# Altium PCB nrf52840_bma250e.PcbDoc
Units mm, origin at the board's own origin, x right, y up, seen from the top; angles counter-clockwise.
Board outline 28.1 x 32.5 mm, 2 copper layers (Top Layer, Bottom Layer), stack 0.325 mm thick; 21 components, 59 nets, 119 pads, 88 vias.
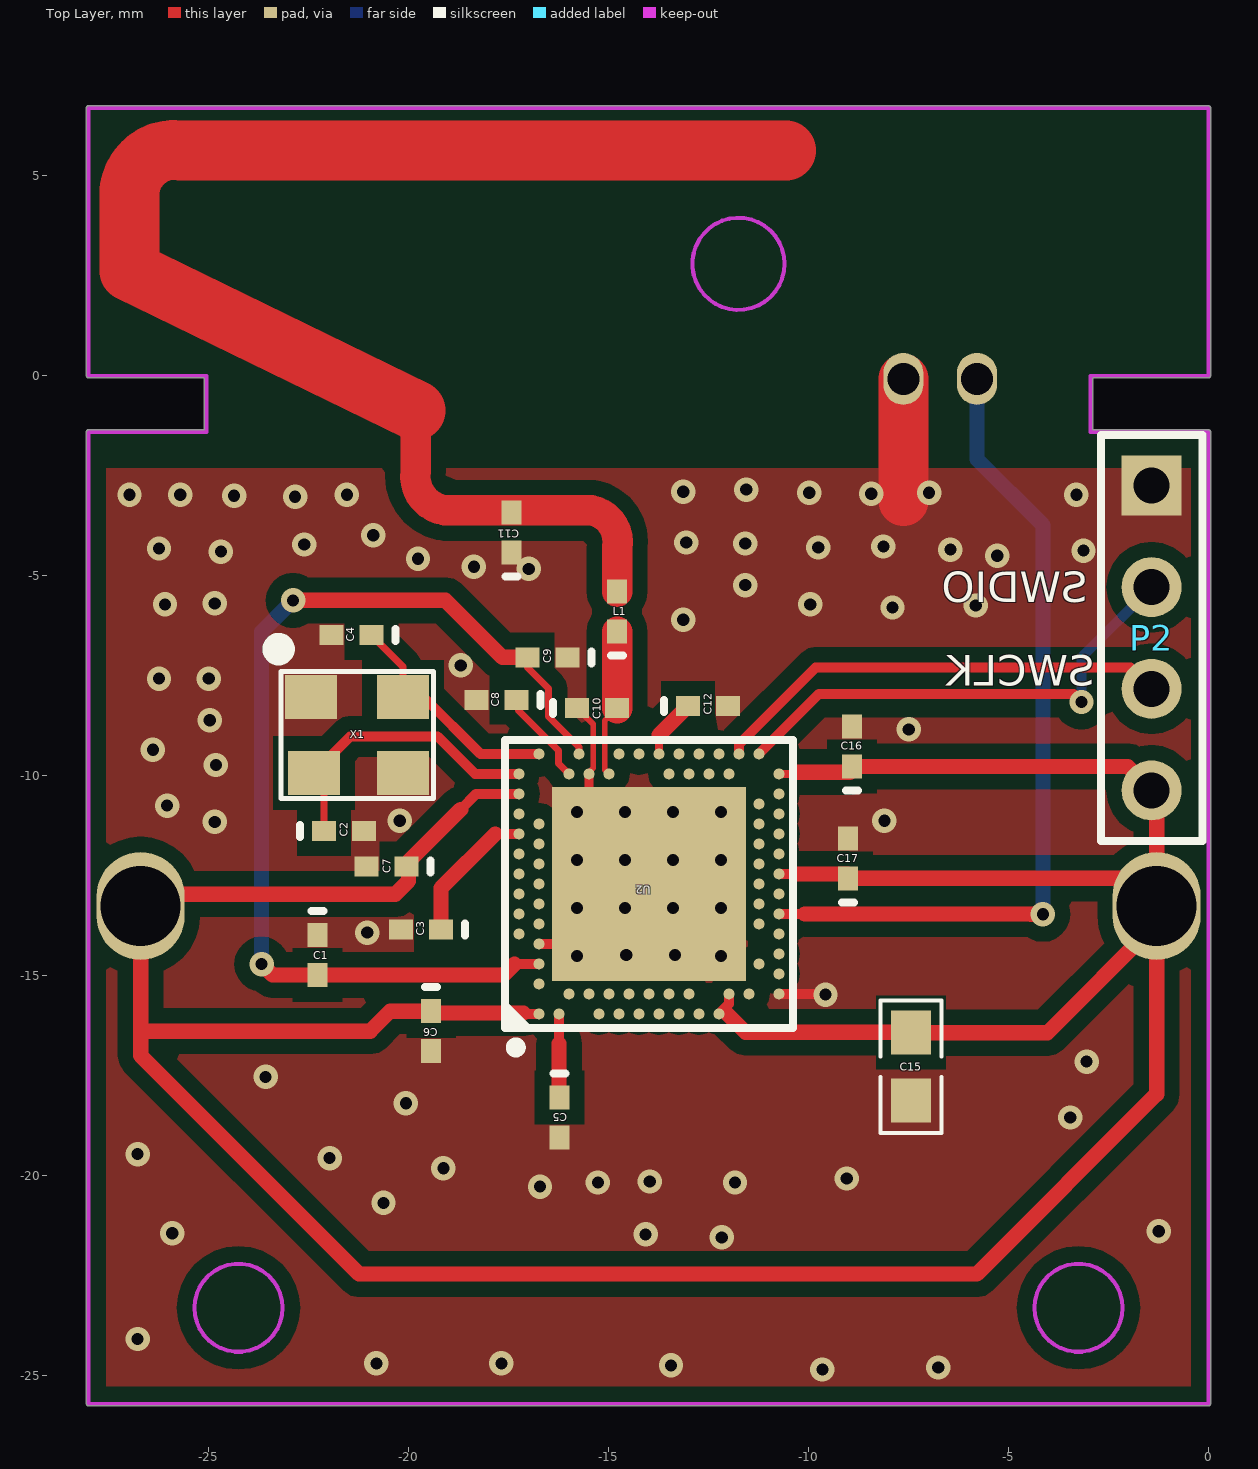
[diagram p0: Top Layer view]
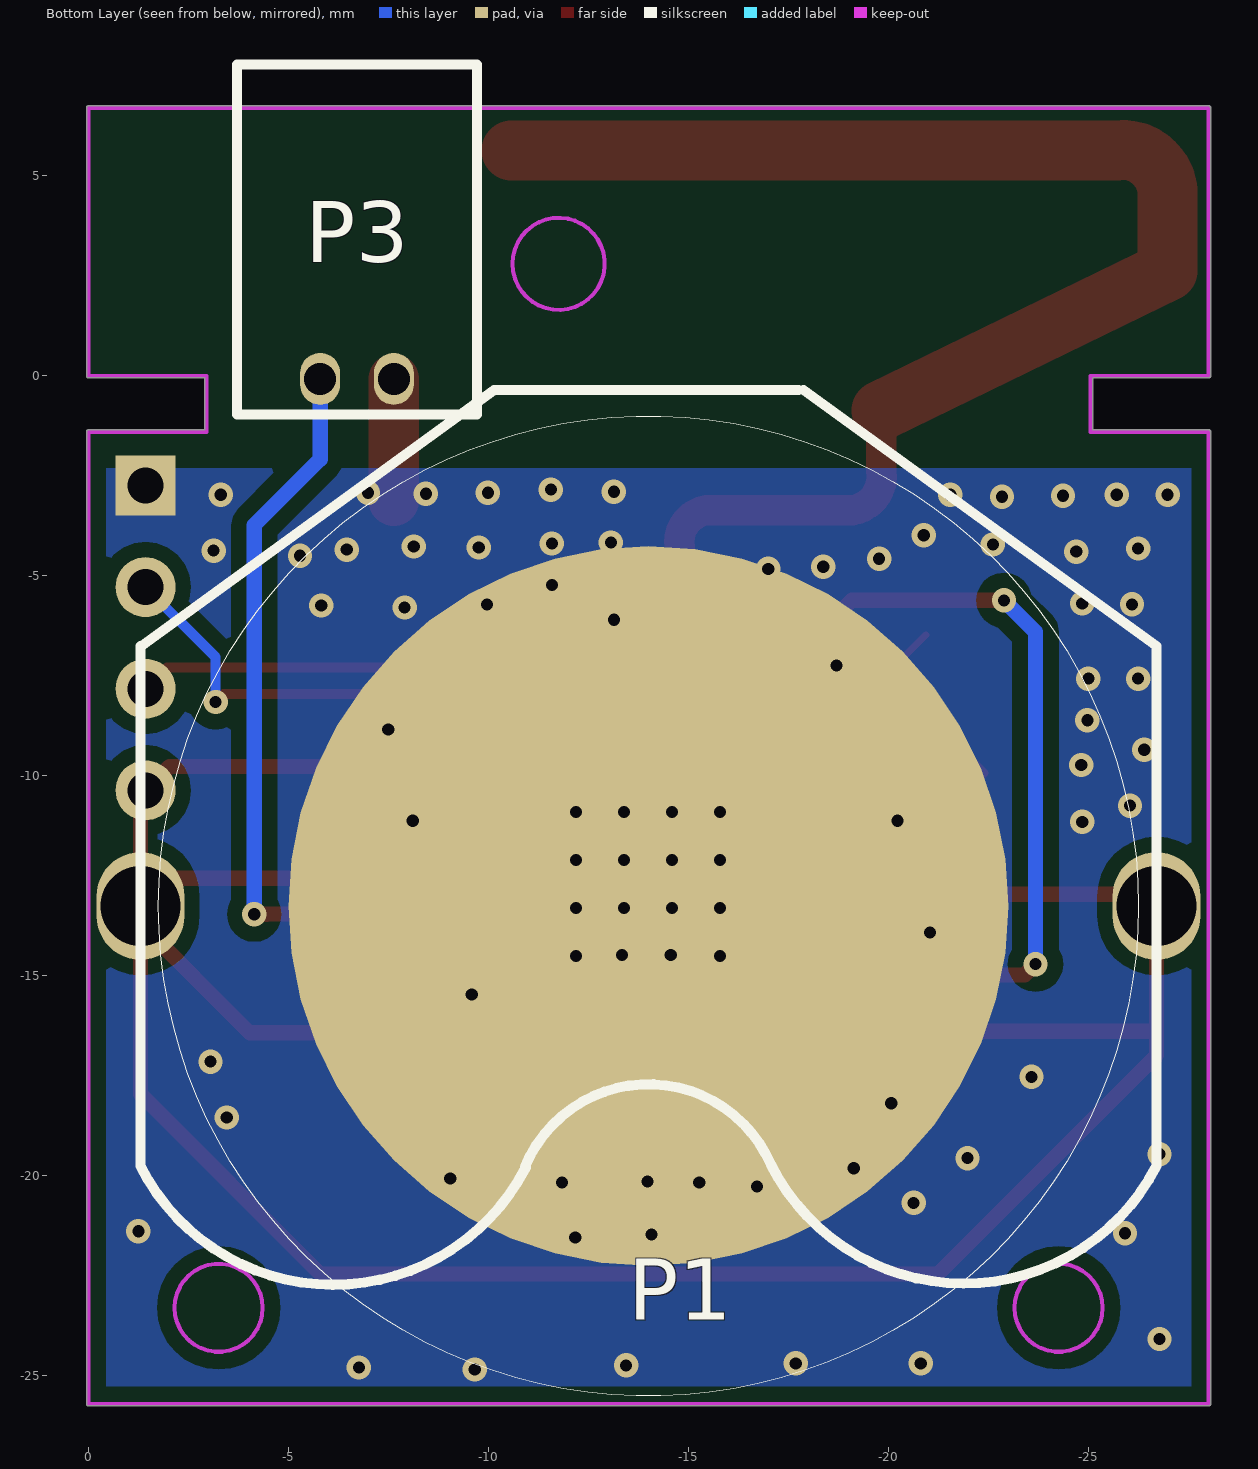
[diagram p1: Bottom Layer view, seen from below]

## Layer stack, top to bottom
Top Layer: signal copper 0.0356
Dielectric: core 0.254, FR-4, Dk 4.2
Bottom Layer: signal copper 0.0356

## Board outline
-28.051,-25.7 ccw(c-28,-25.7) -28,-25.751 0,-25.751 ccw(c0,-25.7) 0.051,-25.7 0.051,-1.4 ccw(c0,-1.4) 0,-1.349 -2.899,-1.349 -2.899,-0.051 0,-0.051 ccw(c0,0) 0.051,0 0.051,6.7 ccw(c0,6.7) 0,6.751 -28,6.751 ccw(c-28,6.7) -28.051,6.7 -28.051,0 ccw(c-28,0) -28,-0.051 -25.101,-0.051 -25.101,-1.349 -28,-1.349 ccw(c-28,-1.4) -28.051,-1.4

## Design rules (kind name [scope] priority, off if disabled: settings)
Clearance [All] p1: gap=0.127
ComponentClearance [All] p1 off: gap=0.254 collisioncheckmode=3 verticalgap=0.254 showdistances=FALSE
Height [All] p1 off: minheight=0 maxheight=25.4 prefheight=12.7
MinimumSolderMaskSliver [All] p1 off: minsoldermaskwidth=0.254
NetAntennae [All] p1 off: netantennaetolerance=0
PlaneConnect [All] p1: planeconnectstyle=Direct reliefexpansion=0.508 reliefentries=4 reliefconductorwidth=0.254 reliefairgap=0.254
PolygonConnect [All] p1: connectstyle=Direct reliefconductorwidth=0.254 reliefentries=4 polygonreliefangle="90 Angle"
RoutingVias [All] p1: holewidth=0.711 width=1.27 viastyle="Through Hole" minholewidth=0.711 minwidth=1.27 maxholewidth=0.711 maxwidth=1.27
SilkToSilkClearance [All] p1 off: silktosilkclearance=0.254
SilkscreenOverComponentPads SilkToSolderMaskClearance [IsPad] p1 off: minsilkscreentomaskgap=0.254
SolderMaskExpansion [All] p1: expansion=0.102
Width [All] p1: maxlimit=2.54 minlimit=0.025 preferedwidth=0.254 minimp=50.000000 maximp=50.000000 favimp=50.000000
21 further rules are at their usual default settings.

## Components (designator, comment, footprint, x,y, rotation, side; value= is the part's Value field where it differs from the comment)
C1 "1.0μF" 0402-A -22.276,-14.478 r270 top
C2 "12pF" 0402-A -21.607,-11.381 r0 top
C3 "N.C." 0402-A -19.685,-13.843 r180 top
C4 "12pF" 0402-A -21.43,-6.478 r180 top
C5 "100nF" 0402-A -16.231,-18.542 r270 top
C6 "1.0μF" 0402-A -19.431,-16.383 r270 top
C7 "100nF" 0402-A -20.549,-12.264 r180 top
C8 "100pF" 0402-A -17.805,-8.098 r180 top
C9 "N.C." 0402-A -16.527,-7.037 r180 top
C10 "0.75pF" 0402-A -15.283,-8.307 r0 top
C11 "NC" 0402-A -17.424,-3.912 r90 top
C12 "820pF" 0402-A -12.514,-8.256 r0 top
C15 "4.7μF" 0603-1 -7.442,-17.272 r270 top
C16 "100nF" 0402-a -8.915,-9.266 r90 top
C17 "100nF" 0402-a -9.017,-12.06 r90 top
L1 "1nH" 0402-A -14.783,-5.893 r90 top
P1 "Header 3" bat -1.295,-13.254 r180 bottom
P2 "Header 4" HDR1X4 -1.422,-2.743 r270 top
P3 "Header 2" connect_2 -3.708,-0.965 r180 bottom
U2 "nRF52840-QIAA" AQFN50P700X700X85_HS-74N -13.987,-12.701 r90 top
X1 "32MHz" SMD3225 -20.134,-8.028 r180 top

## Footprints (in the part's own frame and the unit in brackets; to place one, negate y for a bottom-side part, rotate by r counter-clockwise, add the part's x,y. Pads: shape width x height; smd on the part's side, far side on the other; paste and mask are expansions set on the pad)
0402-A [mm] "Chip Inductor; Body 1 x 0.5 mm (LxW typ"
  rect 0.6x0.5 smd: 1(-0.5,0) 2(0.5,0)
  silkscreen extent -1.1,-0.15 -1.1,0.15
0402-a [mm] "Chip Inductor; Body 1 x 0.5 mm (LxW typ)"
  rect 0.6x0.5 smd: 1(-0.5,0) 2(0.5,0)
  silkscreen extent -1.1,-0.15 -1.1,0.15
0603-1 [mm] "Ì"
  rect 1.1x1 smd: 1(-0.85,0) 2(0.85,0)
  silkscreen extent -1.65,-0.76 1.65,0.76, body extent -1.14,-0.38 1.14,0.38, height 1
AQFN50P700X700X85_HS-74N [mm]
  rect 4.85x4.85 smd mask+0.05: 74(0,0)
  round 0.275 smd paste+0.012 mask+0.05: A8(-1.25,3.25) A10(-0.75,3.25) A12(-0.25,3.25) A14(0.25,3.25) A16(0.75,3.25) A18(1.25,3.25) A20(1.75,3.25) A22(2.25,3.25) A23(2.75,3.25) AA24(3.25,-2.25) AB2(-2.75,-2.5) AC5(-2,-2.75) AC9(-1,-2.75) AC11(-0.5,-2.75) AC13(0,-2.75) AC15(0.5,-2.75) AC17(1,-2.75) AC19(1.5,-2.75) AC21(2,-2.75) AC24(3.25,-2.75) AD2(-2.75,-3.25) AD4(-2.25,-3.25) AD6(-1.75,-3.25) AD8(-1.25,-3.25) AD10(-0.75,-3.25) AD12(-0.25,-3.25) AD14(0.25,-3.25) AD16(0.75,-3.25) AD18(1.25,-3.25) AD20(1.75,-3.25) AD22(2.25,-3.25) AD23(2.75,-3.25) B1(-3.25,2.75) B3(-2.5,2.75) B5(-2,2.75) B7(-1.5,2.75) B9(-1,2.75) B11(-0.5,2.75) B13(0,2.75) B15(0.5,2.75) B17(1,2.75) B19(1.5,2.75) B24(3.25,2.75) C1(-3.25,2.25) D2(-2.75,2) D23(2.75,2) E24(3.25,1.75) F2(-2.75,1.5) F23(2.75,1.5) G1(-3.25,1.25) H2(-2.75,1) H23(2.75,1) J1(-3.25,0.75) J24(3.25,0.75) K2(-2.75,0.5) L1(-3.25,0.25) L24(3.25,0.25) M2(-2.75,0) N1(-3.25,-0.25) N24(3.25,-0.25) P2(-2.75,-0.5) P23(2.75,-0.5) R1(-3.25,-0.75) R24(3.25,-0.75) T2(-2.75,-1) T23(2.75,-1) U1(-3.25,-1.25) U24(3.25,-1.25) V23(2.75,-1.5) W1(-3.25,-1.75) W24(3.25,-1.75) Y2(-2.75,-2) Y23(2.75,-2)
  silkscreen extent -4.21,-3.6 3.6,3.6, body extent -3.55,-3.55 3.55,3.55, height 0.85
bat [mm]
  oval 2.2x2.7 hole 2: 1(0,0) 2(25.4,0)
  round 18 smd: 3(12.7,0)
  silkscreen extent 0,-12.25 25.4,12.9
connect_2 [mm]
  oval 1x1.3 hole 0.8: 1(2.08,0.889) 2(3.92,0.889)
  silkscreen extent 0,0 6,8.75
HDR1X4 [mm] "Connector; Header; 4 Position"
  rect 1.5x1.5 hole 0.9: 1(0,0)
  round 1.5 hole 0.9: 2(2.54,0) 3(5.08,0) 4(7.62,0)
  silkscreen extent -1.27,-1.27 8.89,1.27
SMD3225 [mm]
  rect 1.3x1.1 smd: 1(0,0) 2(2.3,0) 3(2.23,1.9) 4(0,1.9)
  silkscreen extent -0.76,-1.32 3.24,2.54

## Part data
C1 C6: library part C0603-1?, "Capacitor, X7R, ±10%"
C2 C4: library part C0402-12p, "Capacitor, NP0, ±2%"
C3 C9: library part C0402-N.C., "Not mounted"
C5 C7 C16 C17: library part C0402-100n, "Capacitor, X7R, ±10%"
C8: library part C0402-100p, "Capacitor, NP0, ±5%"
C10: library part C0402-0.8p, "Capacitor, NP0, ±10%"
C11: library part C0402-0.5p, "Capacitor, NP0, ±10%"
C12: library part C0402-820p, "Capacitor, NP0, ±5%"
C15: library part C0603-4μ7-6.3V-X, "Capacitor, X7R, ±10%"
L1: library part L0402-4n7, "High frequency chip inductor ±5%"
P1: "Header, 3-Pin"
P2: "Header, 4-Pin"
P3: "Header, 2-Pin"
U2: library part nRF52840-QIAAD0, "Multi-protocol Bluetooth Low Energy, IEEE 802.15.4, ANT and 2.4GHz proprietary system-on-chip"
X1: library part XTAL_SMD2016_32MHz_8pF_General, "XTAL SMD 2016, 32MHz, Cl=8pF, Total Tol: ±40ppm"

## Via types
v1: diameter 0.61, hole 0.305, Top Layer to Bottom Layer, 88 vias

## Nets (pads, with @x,y where several pads share a name; then routed paths per layer and width w, separated by ;. In a path a pad name is that pad's centre, name@x,y a point inside that pad or via, vN(x,y) a via of type N, cw(c..) or ccw(c..) an arc to the next point about the centre after c; other vN are vias at no path point)
DEC1: C5.1 U2.C1 | length 2.1
  Top Layer w0.254: -16.237,-16.695 U2.C1
  Top Layer w0.381: -16.237,-16.695 -16.237,-18.035 C5.1
DEC3: C8.1 U2.D23 | length 2.4
  Top Layer w0.178: C8.1@-17.247,-8.079 -17.247,-8.371 -16.248,-9.369 -16.248,-9.691 U2.D23
DEC4_6: C1.2 C9.2 U2.B5 U2.E24 | length 26
  Top Layer w0.178: C9.2 -17.027,-7.291 -16.502,-7.817 -16.502,-8.518 -15.737,-9.282 U2.E24
  Top Layer w0.254: -17.348,-14.701 U2.B5
  Top Layer w0.381: v1(-23.673,-14.707) -23.401,-14.978 C1.2 -17.625,-14.978 -17.348,-14.701 ; v1(-22.885,-5.613) -19.075,-5.613 -17.652,-7.037 C9.2
  Bottom Layer w0.381: v1(-23.673,-14.707) -23.673,-6.401 v1(-22.885,-5.613)
GND: C1.1 C2.2 C3.2 C4.2 C5.2 C6.2 C7.2 C8.2 C9.1 C10.1 C11.1 C12.2 C15.2 C16.2 C17.2 P1.3 P2.1 P3.2 U2.74 U2.AD2 U2.B7 U2.F23 X1.2 X1.4 | length 8.6
  Top Layer w0.145: C10.1 -15.382,-8.708 -15.382,-9.806 -15.487,-9.911 U2.F23
  Top Layer w0.229: U2.74@-15.487,-11.201 U2.F23
  Top Layer w0.254: U2.B7 U2.74@-15.487,-14.201 ; U2.AD2 -9.593,-15.451 v1(-9.576,-15.469)
  Top Layer w1.254: -7.628,-3.133 -7.628,-2.921 P3.2
  other v1: -9.652,-24.841 -6.756,-24.79 -13.437,-24.74 -20.803,-24.689 -17.678,-24.689 -26.772,-24.079 -12.167,-21.539 -14.072,-21.463 -25.908,-21.438 -1.245,-21.387 -20.625,-20.676 -16.713,-20.269 -15.265,-20.168 -11.836,-20.168 -13.97,-20.142 -9.042,-20.066 -19.126,-19.812 -21.971,-19.558 -26.772,-19.456 -3.454,-18.542 -20.066,-18.186 -23.571,-17.526 -3.048,-17.145 -15.787,-14.501 -12.187,-14.501 -14.554,-14.478 -13.335,-14.478 -21.031,-13.919 -15.787,-13.301 -14.587,-13.301 -13.387,-13.301 -12.187,-13.301 -15.787,-12.101 -14.587,-12.101 -13.387,-12.101 -12.187,-12.101 -24.841,-11.151 -20.218,-11.125 -8.103,-11.121 -15.787,-10.901 -14.587,-10.901 -13.387,-10.901 -12.187,-10.901 -26.035,-10.744 -24.816,-9.728 -26.391,-9.347 -7.493,-8.839 -24.968,-8.611 -26.238,-7.569 -24.994,-7.569 -18.694,-7.239 -13.132,-6.096 -7.899,-5.791 -5.817,-5.74 -26.086,-5.715 -9.957,-5.715 -24.841,-5.69 -11.582,-5.232 -16.993,-4.826 -18.364,-4.775 -19.761,-4.572 -5.283,-4.496 -24.689,-4.394 -3.124,-4.369 -6.452,-4.343 -26.238,-4.318 -9.754,-4.293 -8.128,-4.267 -22.606,-4.216 -11.582,-4.191 -13.056,-4.166 -20.879,-3.988 -22.835,-3.023 -24.359,-2.997 -26.975,-2.972 -25.705,-2.972 -21.539,-2.972 -3.302,-2.972 -8.433,-2.946 -9.982,-2.921 -6.985,-2.921 -13.132,-2.896 -11.557,-2.845
NetC3_1: C3.1 U2.A18 | length 3.5
  Top Layer w0.254: -17.831,-11.451 U2.A18
  Top Layer w0.381: C3.1 -19.185,-12.805 -17.831,-11.451
NetC10_2: C10.2 L1.1 U2.H23 | length 3.7
  Top Layer w0.145: U2.H23 -15.092,-9.846 -15.092,-8.617 C10.2
  Top Layer w0.762: C10.2 L1.1
NetC12_1: C12.1 U2.N24 | length 1.5
  Top Layer w0.203: U2.N24 -13.737,-8.98
  Top Layer w0.381: -13.737,-8.98 C12.1
P0.02/AIN0: U2.A12
P0.03/AIN1: U2.B13
P0.04/AIN2: U2.J1
P0.05/AIN3: U2.K2
P0.06: U2.L1
P0.07: U2.M2
P0.08: U2.N1
P0.09/NFC1: U2.L24
P0.10/NFC2: U2.J24
P0.11: U2.T2
P0.12: U2.U1
P0.13: U2.AD8
P0.14: U2.AC9
P0.15: P3.1 U2.AD10 | length 20.7
  Top Layer w0.254: U2.AD10 -10.094,-13.451
  Top Layer w0.381: -10.094,-13.451 -4.456,-13.451 -4.445,-13.462 v1(-4.14,-13.462)
  Bottom Layer w0.381: P3.1 -5.788,-2.086 -4.14,-3.734 v1(-4.14,-13.462)
P0.16: U2.AC11
P0.17: U2.AD12
P0.18/RESET: U2.AC13
P0.19: U2.AC15
P0.20: U2.AD16
P0.21: U2.AC17
P0.22: U2.AD18
P0.23: U2.AC19
P0.24: U2.AD20
P0.25: U2.AC21
P0.26: U2.G1
P0.27: U2.H2
P0.28/AIN4: U2.B11
P0.29/AIN5: U2.A10
P0.30/AIN6: U2.B9
P0.31/AIN7: U2.A8
P1.00: U2.AD22
P1.01: U2.Y23
P1.02: U2.W24
P1.03: U2.V23
P1.04: U2.U24
P1.05: U2.T23
P1.06: U2.R24
P1.07: U2.P23
P1.08: U2.P2
P1.09: U2.R1
P1.10: U2.A20
P1.11: U2.B19
P1.12: U2.B17
P1.13: U2.A16
P1.14: U2.B15
P1.15: U2.A14
RF: C11.2 L1.2 | length 35.8
  Top Layer w0.762: -19.818,-0.864 -19.818,-2.381 ccw(c-18.966,-2.508) -19.093,-3.361 -18.364,-3.361 -15.435,-3.361 cw(c-15.575,-4.153) -14.783,-4.293 L1.2
  Top Layer w1.499: -26.975,4.648 cw(c-25.844,4.508) -25.705,5.639 -10.566,5.639
  Top Layer w1.5: -26.975,4.648 -26.975,2.616 -19.818,-0.864
SWDCLK: P2.3 U2.AA24 | length 11.6
  Top Layer w0.254: U2.AA24 -11.737,-9.207 -9.82,-7.29 -1.956,-7.29 P2.3
SWDIO: P2.2 U2.AC24 | length 12.4
  Top Layer w0.254: U2.AC24 -9.736,-7.95 -3.378,-7.95 v1(-3.175,-8.153)
  Bottom Layer w0.254: v1(-3.175,-8.153) -3.175,-7.036 P2.2
VDD_NRF: C6.1 C7.1 C15.1 C16.1 C17.1 P1.1 P1.2 P2.4 U2.A22 U2.AD14 U2.AD23 U2.B1 U2.W1 U2.Y2 | length 94.1
  Top Layer w0.203: U2.AD23 -10.235,-9.951
  Top Layer w0.254: -18.694,-10.841 -18.305,-10.451 U2.A22 ; -17.125,-15.927 -17.101,-15.951 U2.B1 ; U2.W1 -11.987,-15.701 U2.Y2 ; U2.AD14 -10.33,-12.451 ; C17.1 -9.009,-12.568 C17.1@-8.857,-12.568 ; C16.1@-8.97,-9.907 C16.1@-8.939,-9.876
  Top Layer w0.381: C6.1@-19.431,-15.927 -17.125,-15.927 ; C6.1 -20.455,-15.883 -20.955,-16.383 -26.695,-16.383 ; -18.694,-10.841 -19.998,-12.145 -19.998,-12.627 -20.329,-12.958 -26.399,-12.958 P1.2 -26.695,-16.383 ; -12.032,-15.953 -11.574,-16.41 -7.454,-16.41 C15.1 -4.027,-16.422 P1.1@-1.295,-13.691 ; -10.33,-12.451 C17.1@-9.021,-12.451 ; -10.235,-9.907 C16.1@-8.97,-9.907 ; C17.1 -1.989,-12.56 P1.1 ; C16.1 -2.019,-9.766 P2.4 -1.295,-10.49 P1.1 ; -26.695,-16.383 -26.695,-16.993 -21.234,-22.454 -5.791,-22.454 -1.295,-17.958 P1.1@-1.295,-13.691 ; P1.1@-1.295,-13.691 P1.1
XC1: C4.1 U2.B24 X1.1 | length 5.9
  Top Layer w0.178: C4.1 -20.134,-7.274 X1.1
  Top Layer w0.254: X1.1 -19.626,-8.028 -18.203,-9.451 U2.B24
XC2: C2.1 U2.A23 X1.3 | length 7.4
  Top Layer w0.178: X1.3 -22.107,-10.185 C2.1
  Top Layer w0.254: X1.3 -21.455,-9.018 -19.271,-9.018 -18.338,-9.951 U2.A23
pads on no net: U2.AB2 U2.AC5 U2.AD4 U2.AD6 U2.B3 U2.D2 U2.F2

## Polygon pours and split planes (outlines as drawn)
GND on Top Layer "Bottom Layer-No Net 1" (solid, remove dead copper, pour order 4): -28.448,-2.311 5.182,-2.311 5.182,-23.038 1.829,-26.391 1.575,-26.645 -28.27,-26.645
GND on Bottom Layer "Bottom Layer-No Net 1" (solid, remove dead copper, pour order 6): -28.423,-2.311 1.981,-2.311 2.261,-2.591 2.032,-2.819 2.032,-27.635 -28.626,-27.635 -29.896,-26.365

## Keep-outs
Keep-Out Layer:
  circle w0.102: c-24.25,-23.3 r1.101
  circle w0.102: c-3.25,-23.3 r1.101
  circle w0.102: c-11.75,2.8 r1.151
  lines w0.102: -28,-25.7 0,-25.7 ; -28,-25.7 -28,-1.4 ; -28,-25.7 -28,-1.4 ; -28,-25.7 0,-25.7 ; -28,-1.4 -25.05,-1.4 ; -28,-1.4 -25.05,-1.4 ; -28,0 -25.05,0 ; -28,0 -28,6.7 ; -28,0 -28,6.7 ; -28,0 -25.05,0 ; -28,6.7 0,6.7 ; -28,6.7 0,6.7 ; -25.05,-1.4 -25.05,0 ; -25.05,-1.4 -25.05,0 ; -2.95,-1.4 0,-1.4 ; -2.95,-1.4 -2.95,0 ; -2.95,-1.4 0,-1.4 ; -2.95,-1.4 -2.95,0 ; -2.95,0 0,0 ; -2.95,0 0,0 ; 0,-25.7 0,-1.4 ; 0,-25.7 0,-1.4 ; 0,0 0,6.7 ; 0,0 0,6.7

## Silkscreen, mask and mechanical layers (free items; w line width, h text height)
Top Overlay:
  text "SWDIO" at -3.023,-5.664 h0.76
  text "SWCLK" at -2.845,-7.747 h0.76
Top Solder:
  rectangle: -28,-2.159 -8.865,6.7
Bottom Solder:
  rectangle: -28,-2.159 -9.703,6.7